# Altium PCB PCBtodojunto.PcbDoc (part 1 of 2)
Units mm, origin at the board's own origin, x right, y up, seen from the top; angles counter-clockwise.
Board outline 200 x 200 mm, 2 copper layers (Top Layer, Bottom Layer); 188 components, 125 nets, 535 pads, 53 vias.
Unrouted connection lines stored in the file: 78.
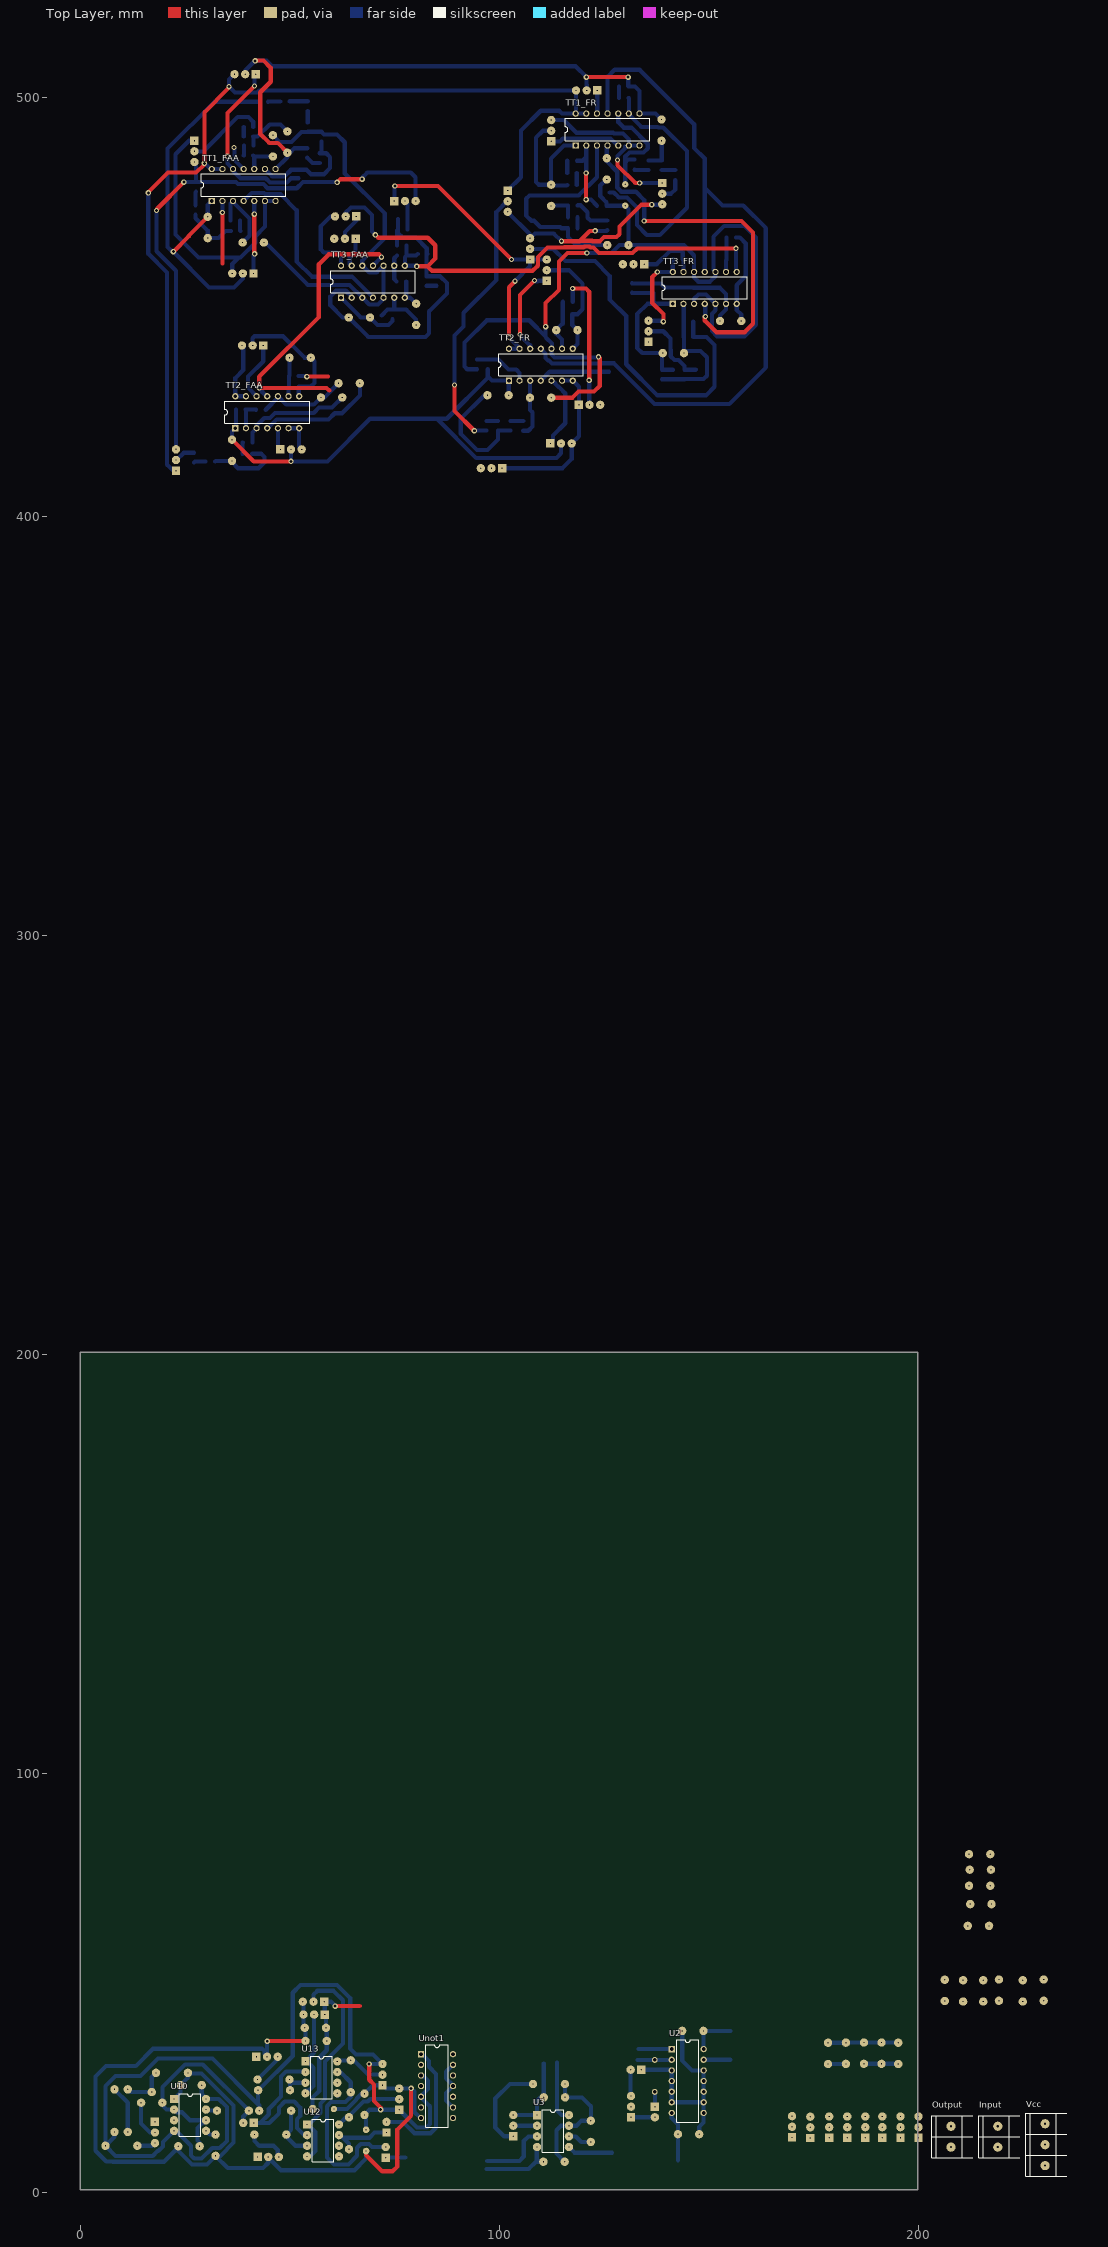
[diagram p0: Top Layer view]
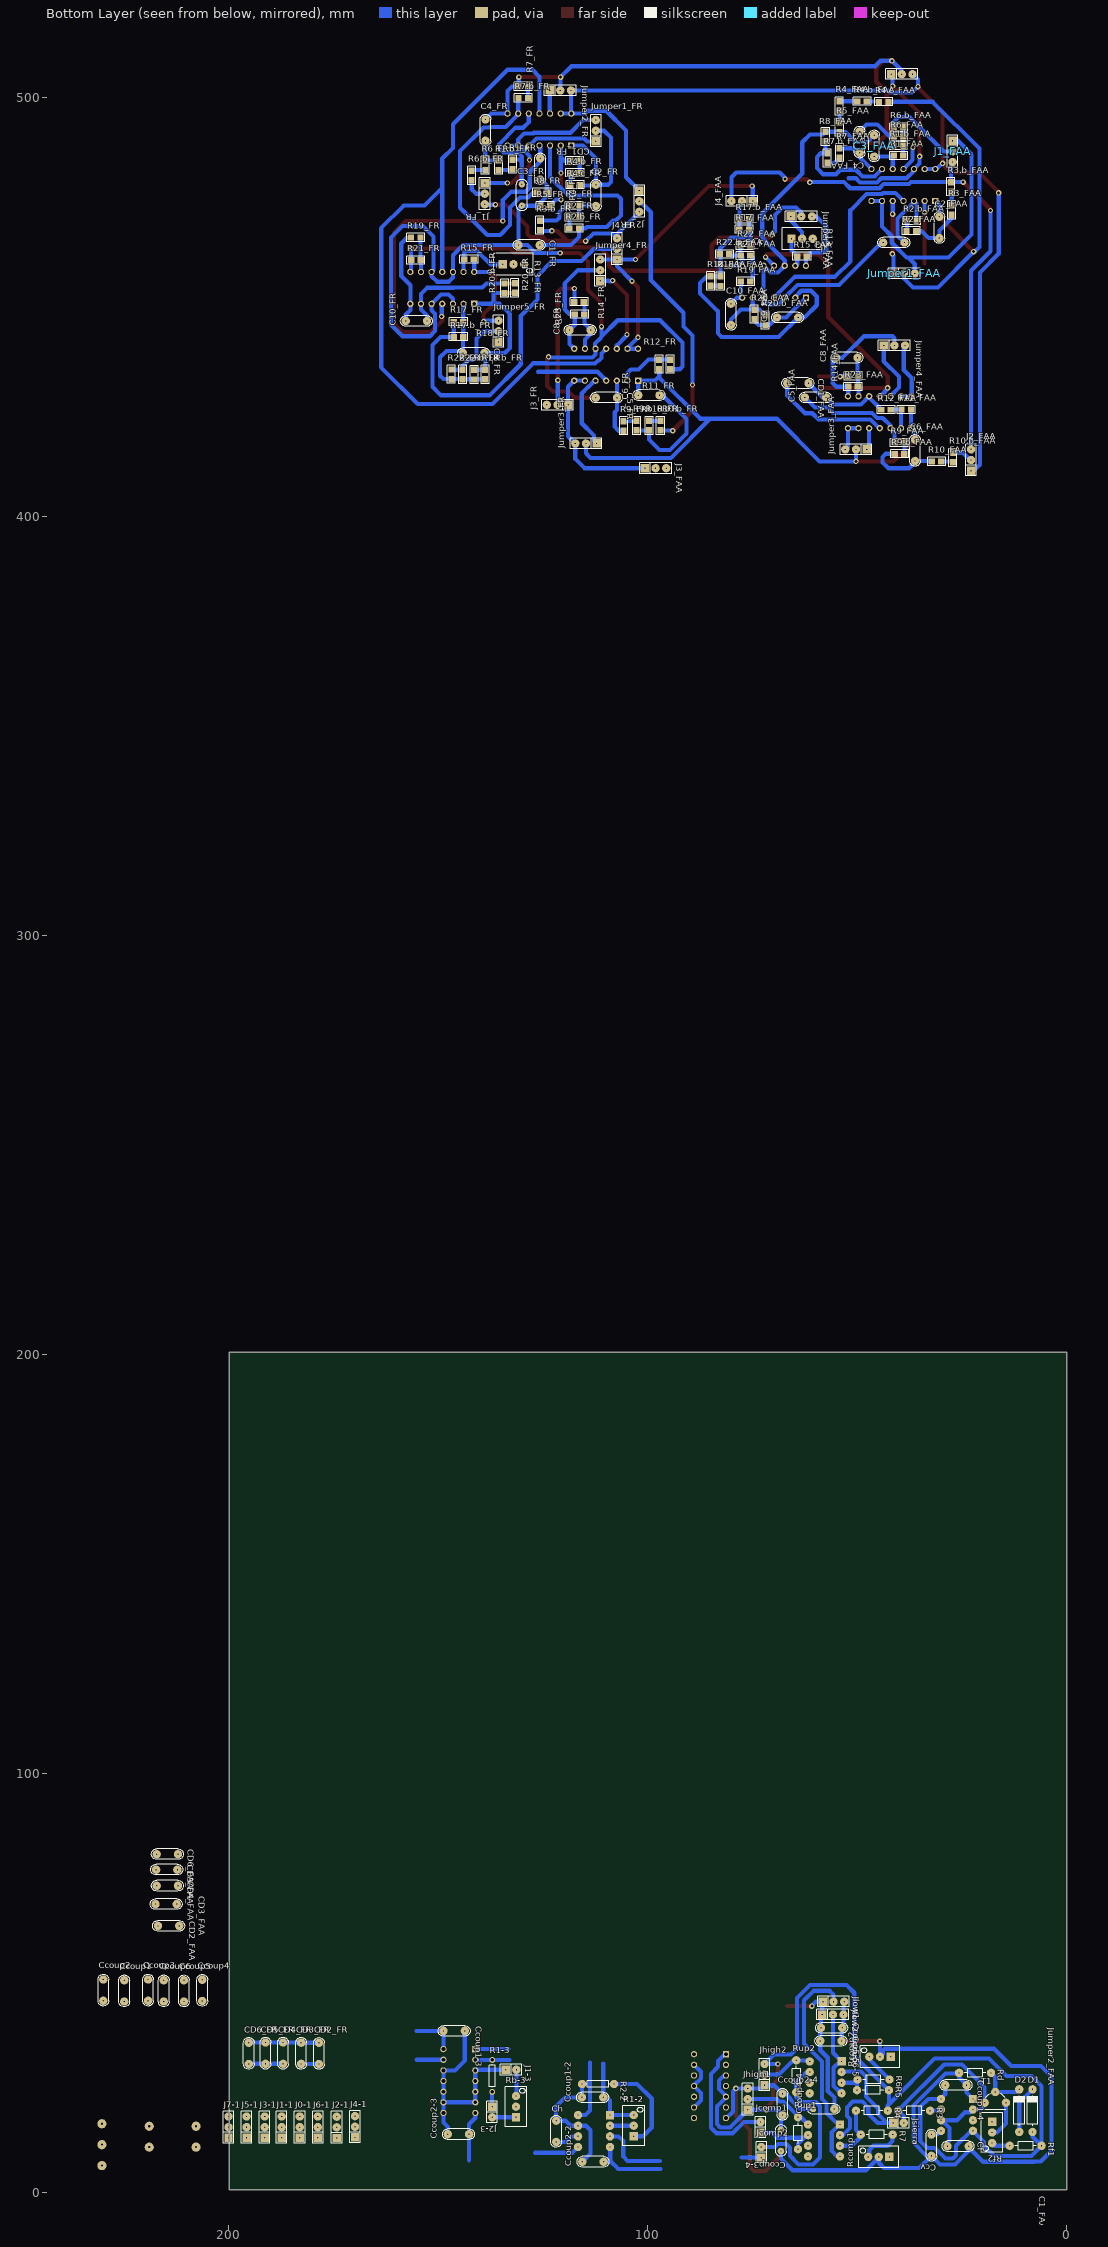
[diagram p1: Bottom Layer view, seen from below]

## Layer stack, top to bottom
Top Solder: solder mask 0.0102, Solder Resist, Dk 3.5
Top Layer: signal copper 0.0356
Dielectric 1: dielectric 0.32, FR-4, Dk 4.8
Bottom Layer: signal copper 0.0356
Bottom Solder: solder mask 0.0102, Solder Resist, Dk 3.5

## Board outline
-0.16,0.526 -0.16,200.526 199.84,200.526 199.84,0.526

## Design rules (kind name [scope] priority, off if disabled: settings)
Clearance [All] p1: gap=0.4 ignorepadtopadclearanceinfootprint=FALSE
PolygonConnect [All] p1: connectstyle=Relief reliefconductorwidth=0.254 reliefentries=4 polygonreliefangle="90 Angle" airgapwidth=0.254
RoutingVias [All] p1: holewidth=0.4 width=2 viastyle="Through Hole" minholewidth=0.3 minwidth=1.9 maxholewidth=0.5 maxwidth=2.1
SolderMaskExpansion [All] p1: expansion=0.102
Width [All] p1: maxlimit=1.1 minlimit=0.9 preferedwidth=1
30 further rules are at their usual default settings.

## Classes and differential pairs
component class "ANALOG SWITCH": Ccoup1-3 Ccoup2-3 J1-3 J2-3 R1-3 Rb-3 U2
component class FAA: C1_FAA C2_FAA C3_FAA C4_FAA C5_FAA C6_FAA C8_FAA C9_FAA C10_FAA CD1_FAA CD2_FAA CD3_FAA CD4_FAA CD5_FAA CD6_FAA J1_FAA J2_FAA J3_FAA J4_FAA Jumper1_FAA Jumper2_FAA Jumper3_FAA Jumper4_FAA Jumper5_FAA R1.b_FAA R1_FAA R2.b_FAA R2_FAA R3.b_FAA R3_FAA R4.b_FAA R4.c_FAA R4_FAA R5_FAA R6.b_FAA R6_FAA R7.b_FAA R7_FAA R8_FAA R9.b_FAA R9_FAA R10.b_FAA R10_FAA R11_FAA R12_FAA R13_FAA R14_FAA R15_FAA R17.b_FAA R17_FAA R18.b_FAA R18_FAA R19_FAA R20.b_FAA R20_FAA R21_FAA R22.b_FAA R22_FAA R23_FAA TT1_FAA TT2_FAA TT3_FAA
component class FR: C1_FR C2_FR C3_FR C4_FR C5_FR C6_FR C8_FR C9_FR C10_FR CD1_FR CD2_FR CD3_FR CD4_FR CD5_FR CD6_FR J1_FR J2_FR J3_FR J4_FR Jumper1_FR Jumper2_FR Jumper3_FR Jumper4_FR Jumper5_FR R1.b_FR R1_FR R2.b_FR R2_FR R3.b_FR R3_FR R4.b_FR R4.c_FR R4_FR R5_FR R6.b_FR R6_FR R7.b_FR R7_FR R8_FR R9.b_FR R9_FR R10.b_FR R10_FR R11_FR R12_FR R13_FR R14_FR R15_FR R17.b_FR R17_FR R18.b_FR R18_FR R19_FR R20.b_FR R20_FR R21_FR R22.b_FR R22_FR R23_FR TT1_FR TT2_FR TT3_FR
component class OSCILADOR: Ccoup1-4 Ccoup2-4 Ccoup3-4 Ccoup4-4 Ccoup5-5 Ccoup6-5 Ccv Cf D1 D2 Jcomp1 Jcomp2 Jhigh1 Jhigh2 Jlow1 Jlow2 Jsierra R3 R4 R5 R6 R7 Rcomp1 Rcomp2 Rd Rf1 Rf2 Rup1 Rup2 T1 U10 U12 U13
component class "SAMPLE AND HOLD": Ccoup1-2 Ccoup2-2 Ch R1-2 R2-2 U3
component class sampler: Ccoup1 Ccoup2 Ccoup3 Ccoup4 Ccoup5 Ccoup6 Input J0-1 J1-1 J2-1 J3-1 J4-1 J5-1 J6-1 J7-1 Output Unot1 Vcc
channel class Schematic: FAA FR

## Components (designator, comment, footprint, x,y, rotation, side; value= is the part's Value field where it differs from the comment)
C1_FAA "1n" CAP200#1 41.18,465.463 r180 bottom (schematic designator C1)
C1_FR "1n" CAP200#1 128.236,464.853 r180 bottom (schematic designator C1)
C2_FAA "1n" CAP200#1 30.296,469.063 r90 bottom (schematic designator C2)
C2_FR "1n" CAP200#1 112.296,476.743 r90 bottom (schematic designator C2)
C3_FAA "1n" CAP200#1 45.87,488.553 r270 bottom (schematic designator C3)
C3_FR "1n" CAP200#2 129.986,476.813 r90 bottom (schematic designator C3)
C4_FAA "1n" CAP200#1 49.33,489.453 r270 bottom (schematic designator C4)
C4_FR "1n" CAP200#1 138.666,492.303 r90 bottom (schematic designator C4)
C5_FAA "1n" CAP200#1 59.89,428.483 r0 bottom (schematic designator C5)
C5_FR "1n" CAP200#1 109.786,428.426 r180 bottom (schematic designator C5)
C6_FAA "1n" CAP200#1 36.106,415.863 r90 bottom (schematic designator C6)
C6_FR "1n" CAP200#1 99.626,428.996 r0 bottom (schematic designator C6)
C8_FAA "7.9n" CAP200#1 52.386,437.973 r0 bottom (schematic designator C8)
C8_FR "7.9n" CAP200#1 116.056,444.556 r0 bottom (schematic designator C8)
C9_FAA "10n" CAP200#1 66.516,447.573 r0 bottom (schematic designator C9)
C9_FR "10n" CAP200#1 141.476,439.063 r180 bottom (schematic designator C9)
C10_FAA "10n" CAP200#1 80.066,448.323 r90 bottom (schematic designator C10)
C10_FR "10n" CAP200#1 155.166,446.733 r0 bottom (schematic designator C10)
Ccoup1 "CAP" CAP200#1 224.91,48.036 r90 bottom
Ccoup1-2 "CAP" CAP200#1 113.09,22.616 r0 bottom
Ccoup1-3 "CAP" CAP200#1 146.13,38.486 r180 bottom
Ccoup1-4 "CAP" CAP200#1 26.34,25.541 r180 bottom
Ccoup2 "CAP" CAP200#1 229.9,48.216 r90 bottom
Ccoup2-2 "CAP" CAP200#1 112.99,7.246 r0 bottom
Ccoup2-3 "CAP" CAP200#1 145.11,13.826 r0 bottom
Ccoup2-4 "CAP" CAP200#1 67.742,20.969 r90 bottom
Ccoup3 "CAP" CAP200#1 219.21,48.216 r90 bottom
Ccoup3-4 "CAP" CAP200#3 68.123,12.333 r270 bottom
Ccoup4 "CAP" CAP200#1 206.28,48.166 r90 bottom
Ccoup4-4 "CAP" CAP200#4 57.9,19.826 r0 bottom
Ccoup5 "CAP" CAP200#1 210.66,48.036 r90 bottom
Ccoup5-5 "CAP" CAP200#1 56.01,39.216 r180 bottom
Ccoup6 "CAP" CAP200#1 215.47,48.036 r90 bottom
Ccoup6-5 "CAP" CAP200#1 56.19,36.096 r180 bottom
Ccv "CAP" CAP200#1 32.182,11.19 r270 bottom
CD1_FAA "100n" CAP200#1 64.09,431.863 r180 bottom (schematic designator CD1)
CD1_FR "100n" CAP200#1 125.596,483.053 r270 bottom (schematic designator CD1)
CD2_FAA "100n" CAP200#1 214.32,63.56 r180 bottom (schematic designator CD2)
CD2_FR "100n" CAP200#1 178.41,33.116 r90 bottom (schematic designator CD2)
CD3_FAA "100n" CAP200#1 214.9,68.756 r180 bottom (schematic designator CD3)
CD3_FR "100n" CAP200#1 182.678,33.148 r90 bottom (schematic designator CD3)
CD4_FAA "100n" CAP200#1 214.62,73.146 r180 bottom (schematic designator CD4)
CD4_FR "100n" CAP200#1 186.99,33.166 r90 bottom (schematic designator CD4)
CD5_FAA "100n" CAP200#1 214.76,76.986 r180 bottom (schematic designator CD5)
CD5_FR "100n" CAP200#1 191.18,33.166 r90 bottom (schematic designator CD5)
CD6_FAA "100n" CAP200#1 214.62,80.686 r180 bottom (schematic designator CD6)
CD6_FR "100n" CAP200#1 195.17,33.126 r90 bottom (schematic designator CD6)
Cf "CAP" CAP200#1 25.832,10.936 r180 bottom
Ch "CAP" CAP200#1 121.78,14.516 r90 bottom
D1 "DIODO SCHOTTKY" DO41 8.052,19.445 r90 bottom
D2 "DIODO SCHOTTKY" DO41 11.227,19.445 r90 bottom
Input "BORNERA 2" BORNERA2 218.942,13.226 r0 top
J0-1 "JUMPER" JUMPER3 183.001,15.512 r90 bottom
J1-1 "JUMPER" JUMPER3 187.319,15.512 r90 bottom
J1-3 "JUMPER" JUMPER2 132.55,29.226 r180 bottom
J1_FAA "JUMPER" JUMPER3 27.13,487.233 r270 bottom (schematic designator J1)
J1_FR "JUMPER" JUMPER3 138.826,477.133 r270 bottom (schematic designator J1)
J2-1 "JUMPER" JUMPER3 174.18,15.466 r90 bottom
J2-3 "JUMPER" JUMPER2 137.07,19.116 r270 bottom
J2_FAA "JUMPER" JUMPER3 22.736,413.543 r90 bottom (schematic designator J2)
J2_FR "JUMPER" JUMPER3 101.92,475.33 r270 bottom (schematic designator J2)
J3-1 "JUMPER" JUMPER3 191.383,15.512 r90 bottom
J3_FAA "JUMPER" JUMPER3 98.05,411.59 r180 bottom (schematic designator J3)
J3_FR "JUMPER" JUMPER3 121.466,426.713 r0 bottom (schematic designator J3)
J4-1 "JUMPER" JUMPER3 169.82,15.596 r90 bottom
J4_FAA "JUMPER" JUMPER3 77.406,475.363 r0 bottom (schematic designator J4)
J4_FR "JUMPER" JUMPER3 107.276,463.953 r90 bottom (schematic designator J4)
J5-1 "JUMPER" JUMPER3 195.701,15.512 r90 bottom
J6-1 "JUMPER" JUMPER3 178.683,15.512 r90 bottom
J7-1 "JUMPER" JUMPER3 200.019,15.512 r90 bottom
Jcomp1 "JUMPER" JUMPER2 73,15.49 r90 bottom
Jcomp2 "JUMPER" JUMPER2 72.79,9.496 r90 bottom
Jhigh1 "JUMPER" JUMPER3 76.04,22.196 r90 bottom
Jhigh2 "JUMPER" JUMPER3 72.04,28.046 r90 bottom
Jlow1 "JUMPER" JUMPER3 55.56,45.466 r180 bottom
Jlow2 "JUMPER" JUMPER3 55.71,42.386 r180 bottom
Jsierra "JUMPER" JUMPER2 40.056,16.524 r180 bottom
Jumper1_FAA "JUMPER" JUMPER3 38.7,458.083 r180 bottom (schematic designator Jumper1)
Jumper1_FR "JUMPER" JUMPER3 112.306,492.163 r90 bottom (schematic designator Jumper1)
Jumper2_FAA "JUMPER" JUMPER3 39.25,505.663 r180 bottom (schematic designator Jumper2)
Jumper2_FR "JUMPER" JUMPER3 120.786,501.783 r180 bottom (schematic designator Jumper2)
Jumper3_FAA "JUMPER" JUMPER3 50.2,416.073 r0 bottom (schematic designator Jumper3)
Jumper3_FR "JUMPER" JUMPER3 114.666,417.503 r0 bottom (schematic designator Jumper3)
Jumper4_FAA "JUMPER" JUMPER3 41.03,440.893 r180 bottom (schematic designator Jumper4)
Jumper4_FR "JUMPER" JUMPER3 111.246,458.863 r90 bottom (schematic designator Jumper4)
Jumper5_FAA "JUMPER" JUMPER3 63.246,471.703 r180 bottom (schematic designator Jumper5)
Jumper5_FR "JUMPER" JUMPER3 135.546,444.273 r90 bottom (schematic designator Jumper5)
Output "BORNERA 2" BORNERA2 207.766,13.226 r0 top
R1-2 "PRESET" "PRESET V" 103.27,15.856 r90 bottom
R1-3 "Res1" AXIAL-0.3#1 137.03,27.746 r90 bottom
R1.b_FAA "39k" 0805 40.106,488.613 r180 bottom (schematic designator R1.b)
R1.b_FR "39k" 0805 135.516,483.903 r270 bottom (schematic designator R1.b)
R1_FAA "5.1k" 0805 40.036,486.223 r0 bottom (schematic designator R1)
R1_FR "5.1k" 0805 132.186,484.123 r90 bottom (schematic designator R1)
R2-2 "Res1" AXIAL-0.3#2 111.78,25.806 r180 bottom value=1K
R2.b_FAA "2.2k" 0805 36.9,470.693 r180 bottom (schematic designator R2.b)
R2.b_FR "2.2k" 0805 117.486,468.863 r180 bottom (schematic designator R2.b)
R2_FAA "33k" 0805 37,468.243 r0 bottom (schematic designator R2)
R2_FR "33k" 0805 117.486,471.513 r0 bottom (schematic designator R2)
R3 "RES" RES300 40.139,19.445 r180 bottom
R3.b_FAA "33k" 0805 27.526,478.753 r270 bottom (schematic designator R3.b)
R3.b_FR "33k" 0805 125.686,469.563 r90 bottom (schematic designator R3.b)
R3_FAA "2.2k" 0805 27.356,473.233 r270 bottom (schematic designator R3)
R3_FR "2.2k" 0805 117.473,474.273 r180 bottom (schematic designator R3)
R4 "RES" RES300 50.216,19.445 r180 bottom
R4.b_FAA "6.8k" 0805 48.75,499.173 r180 bottom (schematic designator R4.b)
R4.b_FR "6.8k" 0805 117.286,482.093 r0 bottom (schematic designator R4.b)
R4.c_FAA "1k" 0805 43.57,499.063 r180 bottom (schematic designator R4.c)
R4.c_FR "1k" 0805 117.273,479.213 r180 bottom (schematic designator R4.c)
R4_FAA "8.2k" 0805 54.17,498.043 r270 bottom (schematic designator R4)
R4_FR "8.2k" 0805 117.303,485.003 r0 bottom (schematic designator R4)
R5 "RES" RES300 49.96,24.336 r180 bottom
R5_FAA "10k" 0805 54.13,492.973 r90 bottom (schematic designator R5)
R5_FR "10k" 0805 124.386,474.253 r180 bottom (schematic designator R5)
R6 "RES" RES300 49.83,26.876 r180 bottom
R6.b_FAA "39k" 0805 40.036,493.023 r180 bottom (schematic designator R6.b)
R6.b_FR "39k" 0805 141.946,481.466 r90 bottom (schematic designator R6.b)
R6_FAA "5.1k" 0805 40.036,490.773 r0 bottom (schematic designator R6)
R6_FR "5.1k" 0805 138.706,483.903 r90 bottom (schematic designator R6)
R7 "RES" RES300 49.073,13.73 r180 bottom
R7.b_FAA "10k" 0805 57.05,485.633 r90 bottom (schematic designator R7.b)
R7.b_FR "10k" 0805 129.633,499.973 r0 bottom (schematic designator R7.b)
R7_FAA "1.5k" 0805 54.09,486.853 r90 bottom (schematic designator R7)
R7_FR "1.5k" 0805 129.653,502.713 r0 bottom (schematic designator R7)
R8_FAA "10k" 0805 57.48,490.763 r270 bottom (schematic designator R8)
R8_FR "10k" 0805 125.16,477.42 r0 bottom (schematic designator R8)
R9.b_FAA "47k" 0805 39.786,415.023 r180 bottom (schematic designator R9.b)
R9.b_FR "47k" 0805 102.576,421.746 r90 bottom (schematic designator R9.b)
R9_FAA "15k" 0805 39.836,417.703 r0 bottom (schematic designator R9)
R9_FR "15k" 0805 105.656,421.676 r270 bottom (schematic designator R9)
R10.b_FAA "47k" 0805 27.056,414.123 r270 bottom (schematic designator R10.b)
R10.b_FR "47k" 0805 96.876,421.746 r90 bottom (schematic designator R10.b)
R10_FAA "15k" 0805 30.953,413.193 r0 bottom (schematic designator R10)
R10_FR "15k" 0805 99.586,421.746 r270 bottom (schematic designator R10)
R11_FAA "5.1k" 0805 38.2,425.583 r0 bottom (schematic designator R11)
R11_FR "5.1k" 0805 97.186,436.369 r90 bottom (schematic designator R11)
R12_FAA "10k" 0805 43.01,425.543 r180 bottom (schematic designator R12)
R12_FR "10k" 0805 94.575,436.359 r90 bottom (schematic designator R12)
R13_FAA "15k" "PRESET V" 63.066,466.363 r180 bottom (schematic designator R13)
R13_FR "15k" "PRESET V" 131.966,460.273 r180 bottom (schematic designator R13)
R14_FAA "10k" 0805 50.876,433.593 r180 bottom (schematic designator R14)
R14_FR "10k" 0805 116.299,451.316 r180 bottom (schematic designator R14)
R15_FAA "1.2k" 0805 63.086,462.163 r180 bottom (schematic designator R15)
R15_FR "1.2k" 0805 142.596,461.473 r180 bottom (schematic designator R15)
R17.b_FAA "6.8k" 0805 76.876,471.083 r180 bottom (schematic designator R17.b)
R17.b_FR "6.8k" 0805 145.106,442.943 r180 bottom (schematic designator R17.b)
R17_FAA "5.6k" 0805 76.886,468.593 r180 bottom (schematic designator R17)
R17_FR "5.6k" 0805 145.106,446.553 r180 bottom (schematic designator R17)
R18.b_FAA "47k" 0805 82.556,456.233 r270 bottom (schematic designator R18.b)
R18.b_FR "47k" 0805 138.746,433.953 r90 bottom (schematic designator R18.b)
R18_FAA "47k" 0805 84.916,456.283 r270 bottom (schematic designator R18)
R18_FR "47k" 0805 141.376,433.906 r90 bottom (schematic designator R18)
R19_FAA "10k" 0805 76.546,456.163 r180 bottom (schematic designator R19)
R19_FR "10k" 0805 155.306,466.663 r180 bottom (schematic designator R19)
R20.b_FAA "6.8k" 0805 71.846,446.93 r90 bottom (schematic designator R20.b)
R20.b_FR "6.8k" 0805 134.076,454.536 r90 bottom (schematic designator R20.b)
R20_FAA "5.6k" 0805 74.446,448.313 r90 bottom (schematic designator R20)
R20_FR "5.6k" 0805 131.636,454.606 r90 bottom (schematic designator R20)
R21_FAA "10k" 0805 76.606,462.333 r0 bottom (schematic designator R21)
R21_FR "10k" 0805 155.276,461.243 r0 bottom (schematic designator R21)
R22.b_FAA "6.8k" 0805 81.576,462.703 r180 bottom (schematic designator R22.b)
R22.b_FR "6.8k" 0805 144.126,433.953 r90 bottom (schematic designator R22.b)
R22_FAA "5.6k" 0805 76.606,464.733 r0 bottom (schematic designator R22)
R22_FR "5.6k" 0805 146.826,434.006 r90 bottom (schematic designator R22)
R23_FAA "10k" 0805 50.916,431.043 r0 bottom (schematic designator R23)
R23_FR "10k" 0805 116.196,448.346 r0 bottom (schematic designator R23)
Rb-3 "PRESET" "PRESET V" 131.38,20.396 r90 bottom
Rcomp1 "PRESET" "PRESET V" 44.755,8.396 r0 bottom
Rcomp2 "PRESET" "PRESET V" 44.47,32.326 r0 bottom
Rd "RES" RES300 25.578,28.462 r180 bottom
Rf1 "RES" RES300 13.513,11.063 r180 bottom
Rf2 "PRESET" "PRESET V" 17.704,14.238 r270 bottom
Rup1 "RES" RES300 64.04,10.256 r90 bottom
Rup2 "RES" RES300 64.45,23.836 r90 bottom
T1 "TRANSISTOR PNP" TO92 16.942,22.62 r0 bottom
TT1_FAA "TL084ACN" DIP14 38.886,479.194 r0 top (schematic designator TT1)
TT1_FR "TL084ACN" DIP14 125.776,492.433 r0 top (schematic designator TT1)
TT2_FAA "TL084ACN" DIP14 44.516,424.95 r0 top (schematic designator TT2)
TT2_FR "TL084ACN" DIP14 109.838,436.299 r0 top (schematic designator TT2)
TT3_FAA "TL084ACN" DIP14 69.756,456.114 r0 top (schematic designator TT3)
TT3_FR "TL084ACN" DIP14 148.978,454.64 r0 top (schematic designator TT3)
U2 "TLC4066IN" N014 144.9,26.516 r270 top
U3 "LF398" DIP8 108.93,18.386 r0 top
U10 "LM555" DIP8 22.276,22.239 r0 top
U12 "IC_DIP8" DIP8 54.026,16.143 r0 top
U13 "IC_DIP8" DIP8 53.64,31.196 r0 top
Unot1 "SN7404N" N014 85.06,25.306 r270 top
Vcc "BORNERA 3" BORNERA3 230.245,11.321 r0 top

## Footprints (in the part's own frame and the unit in brackets; to place one, negate y for a bottom-side part, rotate by r counter-clockwise, add the part's x,y. Pads: shape width x height; smd on the part's side, far side on the other; paste and mask are expansions set on the pad)
0805 [mil] "Pasivo 0805"
  rect 60x56 smd: 1(-45,0) 2(45,0)
  silkscreen extent -85,-38 85,38, body extent -40,-25 39,25, height 15
AXIAL-0.3#1 [mm] "Axial Device, Thru-Hole; 2 Leads; 0.3 in Pin Spacing"
  round 1.4 hole 0.85: 1(-3.81,0) 2(3.81,0)
  silkscreen extent -2.77,-0.76 2.77,0.76
AXIAL-0.3#2 [mm] "Axial Device, Thru-Hole; 2 Leads; 0.3 in Pin Spacing"
  round 2 hole 0.3: 1(-3.81,0) 2(3.81,0)
  silkscreen extent -2.77,-0.76 2.77,0.76
BORNERA2 [mm] "Bornera con Tornillos 5mm separación"
  round 2.2 / inner round 3.75 / far side round 2.2 hole 0.5 unplated: 1(0,2.5) 2(0,-2.5)
  silkscreen extent -4.6,-5 5.2,5, body extent -3.76,-4.89 3.94,5.61, height 10
BORNERA3 [mm] "Bornera con Tornillos 5mm separación"
  round 2.2 / inner round 3.75 / far side round 2.2 hole 0.5 unplated: 1(0,5) 2(0,0) 3(0,-5)
  silkscreen extent -4.6,-7.5 5.2,7.5, body extent -3.76,-7.39 3.94,8.11, height 10.05
CAP200#1 [mm]
  round 2 hole 0.3: 1(-2.54,0) 2(2.54,0)
  silkscreen extent -3.81,-1.27 3.81,1.27, body extent -2.79,-1.17 2.79,1.12, height 6.24
CAP200#2 [mm]
  round 1.5 hole 0.3: 1(-2.54,0) 2(2.54,0)
  silkscreen extent -3.81,-1.27 3.81,1.27, body extent -2.79,-1.17 2.79,1.12, height 6.24
CAP200#3 [mm]
  round 1.6 hole 0.3: 1(-2.54,0) 2(2.54,0)
  silkscreen extent -3.81,-1.27 3.81,1.27, body extent -2.79,-1.17 2.79,1.12, height 6.24
CAP200#4 [mm]
  round 2 hole 0.3: 1(-2.54,0)
  round 1.5 hole 0.3: 2(2.54,0)
  silkscreen extent -3.81,-1.27 3.81,1.27, body extent -2.79,-1.17 2.79,1.12, height 6.24
DIP8 [mm]
  rect 2x2 hole 0.3: 1(0,0)
  round 2 hole 0.3: 2(0,-2.54) 3(0,-5.08) 4(0,-7.62) 5(7.62,-7.62) 6(7.62,-5.08) 7(7.62,-2.54) 8(7.62,0)
  silkscreen extent 1.27,-8.89 6.35,1.27, body extent -0.06,-9.21 7.7,1.59, height 4.5
DIP14 [mm] "DIP; 14 Leads; Row Spacing 7.62 mm; Pitch 2.54 mm"
  rect 1.5x1.5 hole 0.9: 1(-7.62,-3.81)
  round 1.5 hole 0.9: 2(-5.08,-3.81) 3(-2.54,-3.81) 4(0,-3.81) 5(2.54,-3.81) 6(5.08,-3.81) 7(7.62,-3.81) 8(7.62,3.81) 9(5.08,3.81) 10(2.54,3.81) 11(0,3.81) 12(-2.54,3.81) 13(-5.08,3.81) 14(-7.62,3.81)
  silkscreen extent -10.1,-2.65 10.1,2.65
DO41 [mm]
  round 2 hole 0.3: 1(-5.08,0) 2(5.08,0)
  silkscreen extent -3.56,-1.27 3.56,1.27, body extent -5.46,-1.19 5.46,1.37, height 2.03
JUMPER2 [mm]
  rect 2x2 hole 0.3: 1(-1.27,0)
  round 2 hole 0.3: 2(1.27,0)
  silkscreen extent -2.54,-1.27 2.54,1.27, body extent -2.46,-1.27 2.54,1.27, height 9.5
JUMPER3 [mm]
  rect 2x2 hole 0.3: 1(-2.54,0)
  round 2 hole 0.3: 2(0,0) 3(2.54,0)
  silkscreen extent -3.81,-1.27 3.81,1.27, body extent -3.81,-1.3 3.81,1.27, height 16.15
N014 [mm] "DIP; 14 Leads; Row Spacing 7.62 mm; Pitch 2.54 mm"
  rect 1.5x1.5 hole 0.9: 1(-7.62,-3.81)
  round 1.5 hole 0.9: 2(-5.08,-3.81) 3(-2.54,-3.81) 4(0,-3.81) 5(2.54,-3.81) 6(5.08,-3.81) 7(7.62,-3.81) 8(7.62,3.81) 9(5.08,3.81) 10(2.54,3.81) 11(0,3.81) 12(-2.54,3.81) 13(-5.08,3.81) 14(-7.62,3.81)
  silkscreen extent -9.85,-2.65 9.85,2.65
"PRESET V" [mm]
  rect 2x2 hole 0.3: 1(-2.54,0)
  round 2 hole 0.3: 2(0,0) 3(2.54,0)
  silkscreen extent -4.76,-2.6 4.76,2.6, body extent -4.7,-2.42 4.83,2.42, height 11.55
RES300 [mm]
  round 2 hole 0.3: 1(0,0) 2(7.62,0)
  silkscreen extent 1.27,-1.02 6.35,1.02, body extent -0.25,-0.97 7.87,0.97, height 2.01
TO92 [mm]
  round 2 hole 0.3: 1(0,-1.27) 2(2.54,1.27) 3(-2.54,1.27)
  silkscreen extent -2.54,-1 2.54,2.92, body extent -2.79,-1.55 2.79,2.79, height 8

## Part data
C1_FAA C1_FR C2_FAA C2_FR C3_FAA C3_FR C4_FAA C4_FR C5_FAA C5_FR C6_FAA C6_FR C8_FAA C8_FR C9_FAA C9_FR C10_FAA C10_FR CD1_FAA CD1_FR CD2_FAA CD2_FR CD3_FAA CD3_FR CD4_FAA CD4_FR CD5_FAA CD5_FR CD6_FAA CD6_FR: library part CAP
J0-1 J1-1 J1_FAA J1_FR J2-1 J2_FAA J2_FR J3-1 J3_FAA J3_FR J4-1 J4_FAA J4_FR J5-1 J6-1 J7-1 Jhigh1 Jhigh2 Jlow1 Jlow2 Jumper1_FAA Jumper1_FR Jumper2_FAA Jumper2_FR Jumper3_FAA Jumper3_FR Jumper4_FAA Jumper4_FR Jumper5_FAA Jumper5_FR: library part JUMPER3
R1-3 R2-2: "Resistor", LatestRevisionDate=17-Jul-2002, LatestRevisionNote="Re-released for DXP Platform.", PackageDescription="Axial Device, Thru-Hole; 2 Leads; 0.3 in Pin Spacing", PackageReference=AXIAL-0.3, Published=8-Jun-2000, Publisher="Altium Limited"
R1.b_FAA R1.b_FR R1_FAA R1_FR R2.b_FAA R2.b_FR R2_FAA R2_FR R3.b_FAA R3.b_FR R3_FAA R3_FR R4.b_FAA R4.b_FR R4.c_FAA R4.c_FR R4_FAA R4_FR R5_FAA R5_FR R6.b_FAA R6.b_FR R6_FAA R6_FR R7.b_FAA R7.b_FR R7_FAA R7_FR R8_FAA R8_FR R9.b_FAA R9.b_FR R9_FAA R9_FR R10.b_FAA R10.b_FR R10_FAA R10_FR R11_FAA R11_FR R12_FAA R12_FR R14_FAA R14_FR R15_FAA R15_FR R17.b_FAA R17.b_FR R17_FAA R17_FR R18.b_FAA R18.b_FR R18_FAA R18_FR R19_FAA R19_FR R20.b_FAA R20.b_FR R20_FAA R20_FR R21_FAA R21_FR R22.b_FAA R22.b_FR R22_FAA R22_FR R23_FAA R23_FR: library part RES
R13_FAA R13_FR: library part PRESET
TT1_FAA TT1_FR TT2_FAA TT2_FR TT3_FAA TT3_FR: "General-Purpose J-FET Quad Operational Amplifier", ComponentLink1Description="Manufacturer Link", ComponentLink1URL=http://www.st.com/, ComponentLink2Description=Datasheet, ComponentLink2URL=http://www.st.com/stonline/products/literature/ds/2301/tl084.pdf, DatasheetVersion=Jan-1999, LatestRevisionDate=06-Jun-2005, LatestRevisionNote="Stylized 3D Model Added.", PackageDescription="DIP; 14 Leads; Row Spacing 7.62 mm; Pitch 2.54 mm", PackageReference=DIP14, PackageVersion=Jan-1997, Published=24-Aug-2001, Publisher="Altium Limited"
U2: "Quadruple Bilateral Analog Switch", ComponentLink1Description="Manufacturer Link", ComponentLink1URL=http://www.ti.com/, DatasheetVersion=Jan-1986, LatestRevisionDate=04-Mar-2005, LatestRevisionNote="Stylized 3D Model Added.", PackageDescription="DIP; 14 Leads; Row Spacing 7.62 mm; Pitch 2.54 mm", PackageReference=N014, PackageVersion=Oct-1995, Published=8-Jun-2000, Publisher="Altium Limited"
U3: library part LM555, "Sample and Hold Amplifier"
U10: "Timer"
Unot1: "Hex Inverter", ComponentLink1Description="Manufacturer Link", ComponentLink1URL=http://www.ti.com/, ComponentLink2Description=Datasheet, ComponentLink2URL=http://www-s.ti.com/sc/ds/sn5404.pdf, ComponentLink3Description="Packaging Specification", ComponentLink3URL=http://focus.ti.com/lit/ml/mpdi002c/mpdi002c.pdf, DatasheetVersion=Mar-1988, LatestRevisionDate=04-Mar-2005, LatestRevisionNote="Stylized 3D Model Added.", PackageDescription="DIP; 14 Leads; Row Spacing 7.62 mm; Pitch 2.54 mm", PackageReference=N014, PackageVersion=Oct-1995, Published=8-Jun-2000, Publisher="Altium Limited"

## Via types
v1: diameter 1.27, hole 0.711, Top Layer to Bottom Layer, 53 vias

## Nets (pads, with @x,y where several pads share a name; then routed paths per layer and width w, separated by ;. In a path a pad name is that pad's centre, name@x,y a point inside that pad or via, vN(x,y) a via of type N, cw(c..) or ccw(c..) an arc to the next point about the centre after c; other vN are vias at no path point)
Clk1: Jcomp2.1 U3.8 | length 19.5
  Bottom Layer w1: Jcomp2.1@72.79,8.226 77.47,8.226 ; 113.68,30.956 113.68,19.516 114.81,18.386 U3.8@116.55,18.386
Clk2: U2.13 Unot1.2 | length 6.4
  Bottom Layer w1: U2.13@148.71,31.596 155.08,31.596
comp: Jsierra.1 U12.2 U13.2 | length 42.4
  Bottom Layer w1: Jsierra.1@41.326,16.524 42.828,16.524 ; U13.2@53.64,28.656 53.64,28.776 49.043,28.776 47.84,27.573 47.84,22.826 44.87,19.856 44.87,18.566 42.828,16.524 ; U12.2@54.026,13.603 53.293,13.603 51.616,15.28 51.616,17.406 52.38,18.17 52.38,20.202 50.978,21.604 48.692,21.604 47.295,20.207 47.295,18.81 45.009,16.524 42.828,16.524
GND: C1_FAA.1 C1_FR.1 C3_FAA.1 C3_FR.1 C5_FAA.1 C5_FR.1 Ccoup1-2.2 Ccoup1-3.2 Ccoup1-4.2 Ccoup1.2 Ccoup2-2.2 Ccoup2-3.2 Ccoup2-4.2 Ccoup2.2 Ccoup3-4.2 Ccoup3.2 Ccoup4-4.2 Ccoup4.2 Ccoup5-5.2 Ccoup5.2 Ccoup6-5.2 Ccoup6.2 Ccv.2 CD1_FAA.2 CD1_FR.2 CD2_FAA.2 CD2_FR.2 CD3_FAA.2 CD3_FR.2 CD4_FAA.2 CD4_FR.2 CD5_FAA.2 CD5_FR.2 CD6_FAA.2 CD6_FR.2 Cf.2 Ch.2 Input.1 J1-3.1 Jhigh1.3 Jhigh2.1 Jlow1.3 Jlow2.3 Output.1 R2-2.1 R5_FAA.1 R5_FR.1 R8_FAA.1 R8_FR.1 R12_FAA.1 R12_FR.1 Rcomp1.2 Rcomp2.2 Rd.1 TT2_FAA.10 TT2_FR.10 TT3_FAA.3 TT3_FAA.5 TT3_FAA.10 TT3_FAA.12 TT3_FR.3 TT3_FR.5 TT3_FR.10 TT3_FR.12 U2.3 U2.4 U2.5 U2.6 U2.8 U2.9 U2.10 U2.11 U2.12 U3.7 U10.1 Unot1.7 Vcc.2 | length 709.3
  Top Layer w1: v1(44.52,36.016) 44.6,36.096 Ccoup6-5.2@53.65,36.096 ; Ccoup3-4.2@68.123,9.793 68.123,8.803 71.96,4.966 74.45,4.966 75.58,6.096 75.58,14.916 78.87,18.206 v1(78.87,24.786) ; v1(110.976,445.393) 110.976,451.003 114.146,454.173 114.146,460.923 116.176,462.953 v1(120.836,462.953) ; C5_FR.1@112.326,428.426 117.367,428.426 118.82,429.88 122.56,429.88 123.91,431.23 123.91,437.87 v1(123.6,438.18)
  Bottom Layer w1: U10.1@22.276,22.239 23.8,23.763 Ccoup1-4.2@23.8,25.541 25.578,27.319 Rd.1@25.578,28.462 25.705,28.335 28.828,28.335 36.5,20.663 36.5,11.825 33.325,8.65 Ccv.2@32.182,8.65 ; Cf.2@23.292,10.936 Cf.2@23.292,10.708 ; C1_FAA.1@43.72,465.463 44.102,465.463 54.211,455.354 64.166,455.354 TT3_FAA.3@67.216,452.304 68.866,450.654 70.935,450.654 72.296,452.015 TT3_FAA.5@72.296,452.304 TT3_FAA.10@72.296,459.924 70.646,458.274 68.866,458.274 TT3_FAA.12@67.216,459.924 67.216,461.169 72.59,466.543 72.59,472.383 63.02,481.953 63.02,489.413 61.151,491.282 58.104,491.282 R8_FAA.1@57.48,491.906 54.206,491.906 R5_FAA.1@54.13,491.83 52.667,491.83 50.33,489.493 47.47,489.493 C3_FAA.1@45.87,491.093 ; R12_FAA.1@44.153,425.543 47.056,428.446 TT2_FAA.10@47.056,428.76 49.043,426.773 55.64,426.773 C5_FAA.1@57.35,428.483 58.17,428.483 CD1_FAA.2@61.55,431.863 ; v1@44.47,35.426 Rcomp2.2@44.47,32.326 43.83,32.966 43.83,33.699 43.303,34.226 17.28,34.226 13.14,30.086 6.01,30.086 3.51,27.586 3.51,9.866 6.09,7.286 7.69,7.286 7.726,7.25 19.834,7.25 Cf.2@23.292,10.708 ; Rcomp1.2@44.755,8.396 Rcomp1.2@44.755,8.249 ; Jlow1.3@53.02,45.466 53.17,45.316 Jlow2.3@53.17,42.386 53.17,39.516 Ccoup5-5.2@53.47,39.216 53.65,39.036 Ccoup6-5.2@53.65,36.096 ; Ccoup4-4.2@60.44,19.826 63.53,19.826 65.85,22.146 65.85,22.286 67.073,23.509 Ccoup2-4.2@67.742,23.509 69.739,25.506 Jhigh2.1@72.04,25.506 72.81,24.736 Jhigh1.3@76.04,24.736 v1@78.5,24.736 ; Ccoup3-4.2@68.123,9.793 68.123,8.015 65.331,5.223 47.781,5.223 Rcomp1.2@44.755,8.249 ; v1(78.87,24.786) 79.6,24.056 79.6,19.176 81.09,17.686 Unot1.7@81.25,17.686 ; R12_FR.1@94.575,435.216 92.276,435.216 91.646,435.846 91.646,441.596 96.95,446.9 107.08,446.9 110.976,443.004 v1(110.976,445.393) ; 111.083,442.735 112.485,441.333 112.435,440.107 112.378,438.722 113.1,438 123.42,438 v1(123.6,438.18) ; Ccoup2-2.2@115.53,7.246 113.58,9.196 113.58,14.766 114.66,15.846 U3.7@116.55,15.846 118.37,15.846 119.58,17.056 Ch.2@121.78,17.056 121.82,17.096 121.82,20.476 119.68,22.616 Ccoup1-2.2@115.63,22.616 115.63,25.766 R2-2.1@115.59,25.806 ; v1(120.836,462.953) 126.726,462.953 128.626,464.853 C1_FR.1@130.776,464.853 ; CD1_FR.2@125.596,480.513 125.473,480.513 124.017,479.057 R8_FR.1@124.017,477.42 124.017,476.573 125.529,475.061 R5_FR.1@125.529,474.253 C3_FR.1@130.006,474.253 ; C3_FR.1@129.986,474.273 C3_FR.1@130.006,474.253 ; J1-3.1@133.82,29.226 140.92,29.226 U2.3@141.09,29.056 U2.4@141.09,26.516 U2.5@141.09,23.976 U2.6@141.09,21.436 U2.9@148.71,21.436 ; Ccoup1-3.2@143.59,38.486 143.59,31.406 145.94,29.056 U2.12@148.71,29.056 U2.11@148.71,26.516 U2.10@148.71,23.976 U2.9@148.71,21.436 ; TT3_FR.3@146.438,450.83 146.438,452.035 147.496,453.093 149.255,453.093 TT3_FR.5@151.518,450.83 151.518,449.285 150.676,448.443 150.676,444.343 151.936,443.083 158.436,443.083 161.186,445.833 161.186,466.653 158.436,469.403 153.616,469.403 151.076,466.863 151.076,458.892 TT3_FR.10@151.518,458.45 151.518,457.425 150.216,456.123 147.416,456.123 146.438,457.101 TT3_FR.12@146.438,458.45 146.438,462.441 144.026,464.853 C1_FR.1@130.776,464.853 ; Ccoup2-3.2@147.65,13.826 147.65,15.536 148.71,16.596 U2.8@148.71,18.896 U2.9@148.71,21.436 ; CD2_FR.2@178.41,35.656 182.646,35.656 CD3_FR.2@182.678,35.688 186.972,35.688 CD4_FR.2@186.99,35.706 CD5_FR.2@191.18,35.706 195.13,35.706 CD6_FR.2@195.17,35.666 ; Cf.2@23.292,10.708 23.292,9.845 26.522,6.615 30.147,6.615 Ccv.2@32.182,8.65 ; Ccv.2@32.182,8.65 35.103,5.729 43.485,5.729 44.755,6.999 Rcomp1.2@44.755,8.249 ; C3_FR.1@130.006,474.253 130.776,473.483 C1_FR.1@130.776,464.853
high1: Jhigh1.2 Rup1.2 U12.8 | length 17
  Bottom Layer w1: U12.8@61.646,16.143 63.379,17.876 Rup1.2@64.04,17.876 64.04,18.126 67.523,21.609 68.529,21.609 69.116,22.196 Jhigh1.2@76.04,22.196
high2: Jhigh2.2 Rup2.2 U13.8 | length 12.3
  Bottom Layer w1: U13.8@61.26,31.196 61.52,31.456 Rup2.2@64.45,31.456 65.21,31.456 68.62,28.046 Jhigh2.2@72.04,28.046
Input: Input.2 J0-1.2
Input1: J2-1.3 U3.3 | length 16.5
  Bottom Layer w1: 97.05,7.456 104.73,7.456 105.75,8.476 105.75,12.166 106.89,13.306 U3.3@108.93,13.306
Input2: J4-1.3 U2.1 | length 7.9
  Bottom Layer w1: 133.14,34.136 U2.1@141.09,34.136
low1: Jlow1.2 U12.1 U12.4 | length 53.1
  Bottom Layer w1: U12.4@54.026,8.523 54.687,8.523 55.97,9.806 55.97,14.346 U12.1@54.173,16.143 ; U12.1@54.026,16.143 U12.1@54.173,16.143 ; Jlow1.2@55.56,45.466 55.56,47.136 56.48,48.056 60.36,48.056 62.62,45.796 62.62,35.476 58.34,31.196 58.34,22.246 57.27,21.176 57.27,18.956 54.457,16.143 U12.1@54.173,16.143
low2: Jlow2.2 U13.1 U13.4 | length 21.9
  Bottom Layer w1: U13.4@53.64,23.576 53.64,24.216 54.427,24.216 55.54,25.329 55.54,29.686 54.03,31.196 U13.1@53.64,31.196 55.71,33.266 Jlow2.2@55.71,42.386
NetC1_FAA_2: C1_FAA.2 R2.b_FAA.2 TT1_FAA.3 | length 17.2
  Bottom Layer w1: R2.b_FAA.2@35.757,470.693 35.757,474.795 TT1_FAA.3@36.346,475.384 36.346,475.136 40.27,471.212 40.27,467.093 C1_FAA.2@38.64,465.463
NetC1_FR_2: C1_FR.2 R2.b_FR.2 TT1_FR.3 | length 54.1
  Bottom Layer w1: TT1_FR.3@123.236,488.623 123.236,481.056 118.873,476.693 107.113,476.693 106.34,475.92 106.34,471.93 107.6,470.67 108.19,470.67 109.71,469.15 114.48,469.15 114.766,468.863 R2.b_FR.2@116.343,468.863 116.343,466.756 118.246,464.853 C1_FR.2@125.696,464.853
NetC2_FAA_1: C2_FAA.1 R2_FAA.1 R3_FAA.2 | length 13.1
  Bottom Layer w1: R3_FAA.2@27.356,472.09 27.356,471.273 30.296,468.333 C2_FAA.1@30.296,466.523 32.847,466.523 34.567,468.243 R2_FAA.1@35.857,468.243
NetC2_FR_1: C2_FR.1 R2_FR.1 R3_FR.2 | length 6.8
  Bottom Layer w1: C2_FR.1@112.296,474.203 112.366,474.273 R3_FR.2@116.33,474.273 116.343,474.26 R2_FR.1@116.343,471.513
NetC3_FAA_2: C3_FAA.2 R1_FAA.2 TT1_FAA.10 | length 7.8
  Bottom Layer w1: R1_FAA.2@41.179,486.223 R1_FAA.2@41.389,486.013 ; TT1_FAA.10@41.426,483.004 41.426,485.976 R1_FAA.2@41.389,486.013 ; C3_FAA.2@45.87,486.013 R1_FAA.2@41.389,486.013
NetC3_FR_2: C3_FR.2 R1_FR.2 TT1_FR.10 | length 27.6
  Bottom Layer w1: TT1_FR.10@128.316,496.243 128.316,494.203 129.636,492.883 131.47,492.883 135.356,488.997 135.356,487.953 134.376,486.973 130.98,486.973 129.986,485.98 129.986,484.623 ; C3_FR.2@129.986,479.353 129.986,484.623 ; R1_FR.2@132.186,485.266 130.629,485.266 129.986,484.623
NetC4_FAA_1: C4_FAA.1 R1.b_FAA.1 R6_FAA.2 | length 12.5
  Bottom Layer w1: R1.b_FAA.1@41.249,488.613 41.249,490.703 R6_FAA.2@41.179,490.773 42.22,490.773 45.11,493.663 47.66,493.663 C4_FAA.1@49.33,491.993 C4_FAA.1@49.33,491.693
NetC4_FR_1: C4_FR.1 R1.b_FR.1 R6_FR.2 | length 7.9
  Bottom Layer w1: R1.b_FR.1@135.516,485.046 R6_FR.2@138.706,485.046 138.706,489.723 C4_FR.1@138.666,489.763
NetC5_FAA_2: C5_FAA.2 R9_FAA.2 TT2_FAA.3 | length 27.7
  Bottom Layer w1: R9_FAA.2@40.979,417.703 40.979,420.143 TT2_FAA.3@41.976,421.14 41.976,421.769 43.8,423.593 45.196,423.593 46.386,424.783 55.63,424.783 56.9,426.053 60,426.053 C5_FAA.2@62.43,428.483
NetC5_FR_2: C5_FR.2 R9_FR.2 TT2_FR.3 | length 13.8
  Bottom Layer w1: R9_FR.2@105.656,420.533 106.843,420.533 107.816,421.506 107.816,424.926 107.246,425.496 C5_FR.2@107.246,428.426 107.246,432.437 TT2_FR.3@107.298,432.489
NetC6_FAA_1: C6_FAA.1 R9.b_FAA.1 R10_FAA.2 | length 17.8
  Bottom Layer w1: R10_FAA.2@32.096,413.193 32.226,413.323 C6_FAA.1@36.106,413.323 36.106,413.047 37.57,411.583 42.45,411.583 43.84,412.973 43.84,414.293 43.11,415.023 R9.b_FAA.1@40.929,415.023
NetC6_FR_1: C6_FR.1 R9.b_FR.1 R10_FR.2 | length 28.9
  Bottom Layer w1: C6_FR.1@97.086,428.996 96.376,428.996 90.7,423.32 90.7,419.83 94.57,415.96 97.12,415.96 99.586,418.426 R10_FR.2@99.586,420.603 R9.b_FR.1@102.576,420.603
NetC8_FAA_1: C8_FAA.1 R14_FAA.2 R23_FAA.1 TT2_FAA.9 | length 9.3
  Bottom Layer w1: TT2_FAA.9@49.596,428.76 49.596,430.866 R23_FAA.1@49.773,431.043 49.733,431.083 R14_FAA.2@49.733,433.593 49.846,433.706 C8_FAA.1@49.846,437.973
NetC8_FR_1: C8_FR.1 R14_FR.2 R23_FR.1 TT2_FR.9 | length 12.5
  Bottom Layer w1: TT2_FR.9@114.918,440.109 114.918,442.3 113.516,443.702 C8_FR.1@113.516,444.556 115.053,446.093 R23_FR.1@115.053,448.346 115.053,451.213 R14_FR.2@115.156,451.316
NetC9_FAA_1: C9_FAA.1 R17.b_FAA.2 R17_FAA.2 R18.b_FAA.1 R18_FAA.1 R22.b_FAA.1 R22_FAA.1 TT3_FAA.2 | length 77.5
  Bottom Layer w1: TT3_FAA.2@64.695,452.304 TT3_FAA.2@64.676,452.304 64.676,452.537 63.259,453.954 60.927,453.954 59.576,452.603 59.576,450.497 62.5,447.573 C9_FAA.1@63.976,447.573 68.656,442.893 82.276,442.893 83.176,443.793 83.176,449.043 87.406,453.273 87.406,455.823 85.803,457.426 R18_FAA.1@84.916,457.426 82.606,457.426 R18.b_FAA.1@82.556,457.376 82.556,462.54 R22.b_FAA.1@82.719,462.703 82.606,462.816 82.606,464.083 80.046,466.643 76.876,466.643 75.743,467.776 R17_FAA.2@75.743,468.593 ; R22_FAA.1@75.463,464.733 75.463,468.313 R17_FAA.2@75.743,468.593 ; R17.b_FAA.2@75.733,471.083 75.743,471.073 R17_FAA.2@75.743,468.593